# EAGLE board PCB (EAGLE 9.7.0)
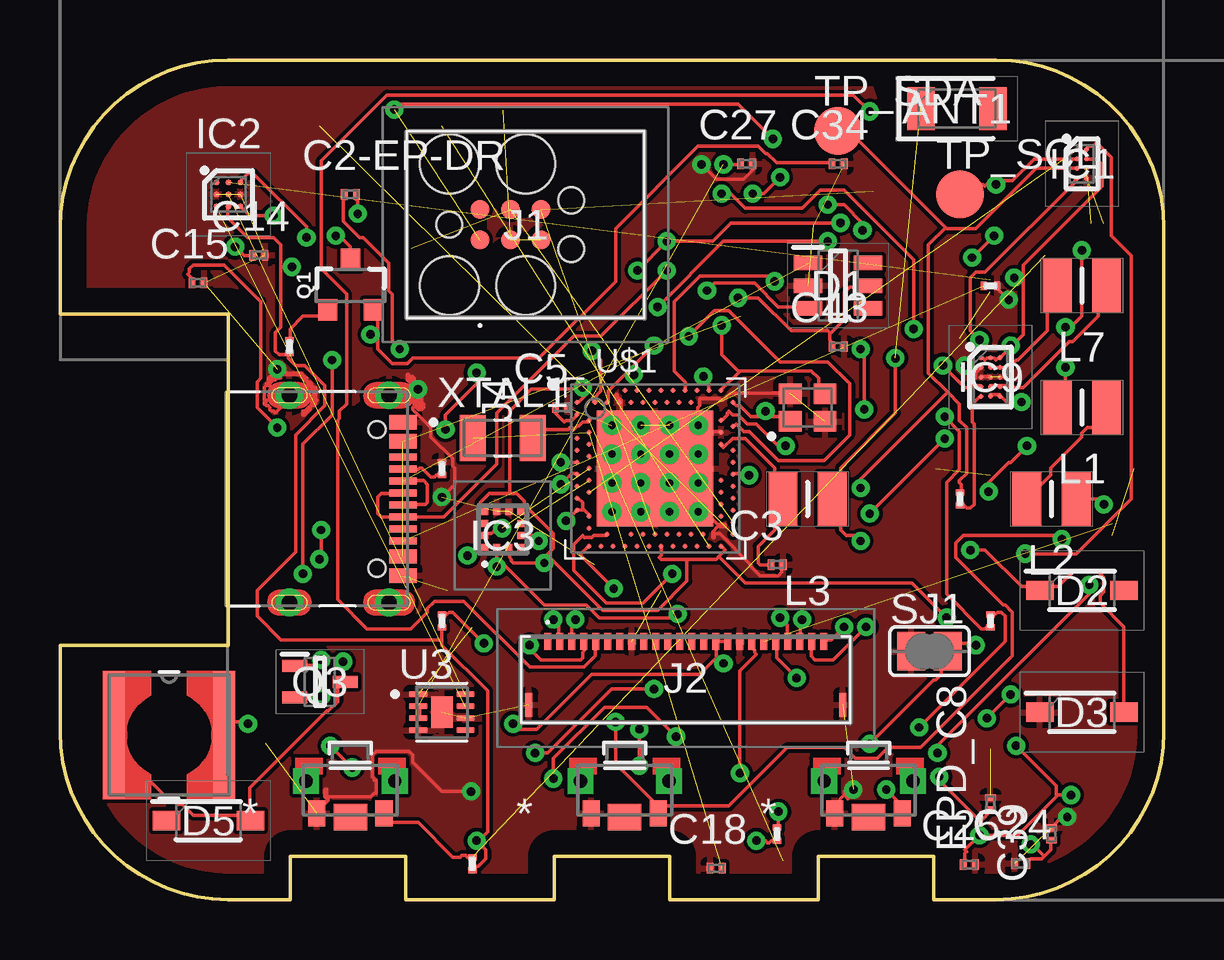
[diagram p0: board, top side]
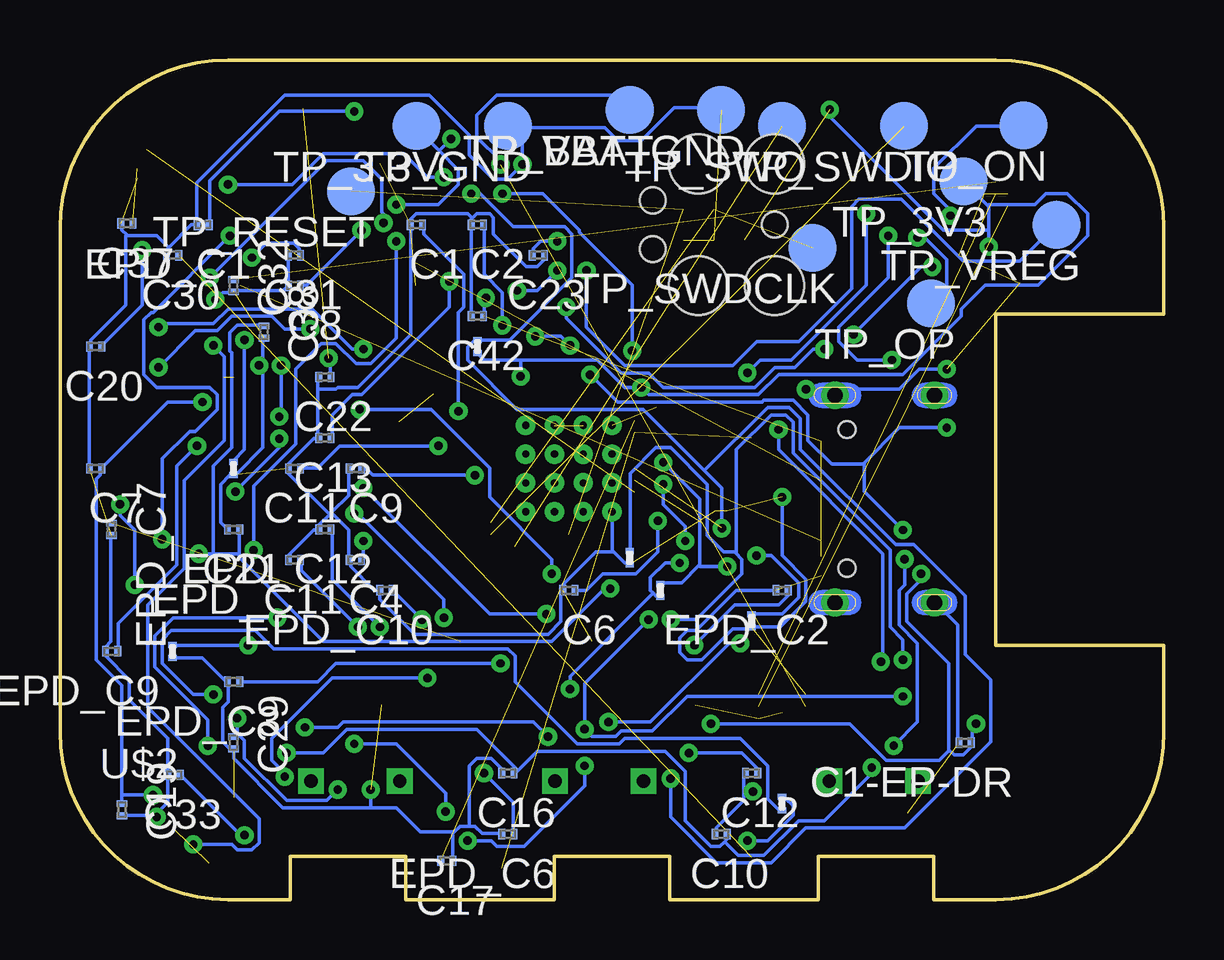
[diagram p1: board, bottom side, seen from below]

Size 46 x 35 mm. Coordinates in mm from the lower left corner, seen from the top.
Outline: 39,0 36.4,0 36.4,1.8 31.6,1.8 31.6,0 25.4,0 25.4,1.8 20.6,1.8 20.6,0 14.4,0 14.4,1.8 9.6,1.8 9.6,0 7,0 arc-90 0,7 0,10.6 7,10.6 7,24.4 0,24.4 0,28 arc-90 7,35 39,35 arc-90 46,28 46,7 arc-90 39,0
Copper layers (1*16): Top 0.035mm / dielectric 1.5mm / Bottom 0.035mm
Design rules "Fusion Electronics Design Rules": minimum track width 6mil, minimum drill 0.35mm, track to track 6mil, track to pad 6mil, pad to pad 6mil, via to via 6mil, smd to smd 6mil, copper to edge 40mil, drill to drill 6mil, minimum pad ring 10mil, minimum via ring 8mil, stop-mask expansion 4mil, vias tented up to drill 9999mil, thermal gap 10mil
tRestrict: area 33.8,30.7 to 41.1,34.4

## Footprints (pad centres in the part's own frame; a part is rotated, then mirrored left to right if it is on the bottom)
2450AT18B100E_ANTC3216X140N = smd 1.15 x 1.8: 1 -1.5,0; 2 1.5,0
NORDIC_NRF_3_RESC0201_L = smd 0.28 x 0.43: 1 -0.255,0; 2 0.255,0
ESP32_C6_LIBRARY_3_SOT95P280X145-6N = smd 1.2 x 0.6: 1 -1.25,0.95; 2 -1.25,0; 3 -1.25,-0.95; 4 1.25,-0.95; 5 1.25,0; 6 1.25,0.95
ESP32_C6_LIBRARY_5_SOD3716X135N = smd 1.15 x 0.8: 1 -1.75,0; 2 1.75,0
BQ25180YBGR_BGA8C40P2X4_100X155X50 = smd 0.2 x 0.2: A1 -0.2,0.6; A2 0.2,0.6; B1 -0.2,0.2; B2 0.2,0.2; C1 -0.2,-0.2; C2 0.2,-0.2; D1 -0.2,-0.6; D2 0.2,-0.6
DRV2605YZFR_BGA9C50P3X3_144X144X62 = smd 0.25 x 0.25: A1 -0.5,0.5; A2 0,0.5; A3 0.5,0.5; B1 -0.5,0; B2 0,0; B3 0.5,0; C1 -0.5,-0.5; C2 0,-0.5; C3 0.5,-0.5
BMA423_BMA423 = smd 0.3 x 0.35: 1 -0.75,-0.775; 2 -0.25,-0.775; 3 0.25,-0.775; 4 0.75,-0.775; 7 0.75,0.775; 8 0.25,0.775; 9 -0.25,0.775; 10 -0.75,0.775 | smd 0.35 x 0.3: 5 0.775,-0.25; 6 0.775,0.25; 11 -0.775,0.25; 12 -0.775,-0.25
RT6160AWSC_BGA15C40P3X5_140X230X60 = smd 0.216 x 0.216: A1 -0.4,0.8; A2 0,0.8; A3 0.4,0.8; B1 -0.4,0.4; B2 0,0.4; B3 0.4,0.4; C1 -0.4,0; C2 0,0; C3 0.4,0; D1 -0.4,-0.4; D2 0,-0.4; D3 0.4,-0.4; E1 -0.4,-0.8; E2 0,-0.8; E3 0.4,-0.8
TC2030-IDC_TC2030IDC = smd 0.783 x 0.783: 1 -0.953,-0.635; 2 -0.953,0.635; 3 0.317,-0.635; 4 0.317,0.635; 5 1.588,-0.635; 6 1.588,0.635 | hole 2.451: -2.223,-2.54; -2.223,2.54; 0.952,-2.54; 0.952,2.54 | hole 1.067: -2.223,0; 2.857,-1.016; 2.857,1.016
503480-2400_5034802400 = smd 0.3 x 0.7: 1 -5.75,1.525; 2 -5.25,1.525; 3 -4.75,1.525; 4 -4.25,1.525; 5 -3.75,1.525; 6 -3.25,1.525; 7 -2.75,1.525; 8 -2.25,1.525; 9 -1.75,1.525; 10 -1.25,1.525; 11 -0.75,1.525; 12 -0.25,1.525; 13 0.25,1.525; 14 0.75,1.525; 15 1.25,1.525; 16 1.75,1.525; 17 2.25,1.525; 18 2.75,1.525; 19 3.25,1.525; 20 3.75,1.525; 21 4.25,1.525; 22 4.75,1.525; 23 5.25,1.525; 24 5.75,1.525 | smd 0.3 x 1: MP1 -6.54,-1.125; MP2 6.54,-1.125
KH-TYPE-C-16P_KINGHELM_KH-TYPE-C-16P = smd 0.6 x 1.15: A1_B12 -3.2,4.725; A4_B9 -2.4,4.725; A9_B4 2.4,4.725; A12_B1 3.2,4.725 | smd 0.3 x 1.15: A5 -1.25,4.725; A6 -0.25,4.725; A7 0.25,4.725; A8 1.25,4.725; B5 1.75,4.725; B6 0.75,4.725; B7 -0.75,4.725; B8 -1.75,4.725 | drill 0.65 pad 1.05: SH1 -4.32,0; SH2 4.32,0; SH3 -4.32,4.15; SH4 4.32,4.15 | hole 0.7: -2.89,3.65; 2.89,3.65
MLP2016SR47MT0S1_INDC2016X100N = smd 1.2 x 2.2: 1 -1.028,0; 2 1.028,0
ESP32_C6_LIBRARY_2_IND_4828-WE-TPC_WRE = smd 0.9 x 5.3: 1 -2.286,0; 2 2.286,0
ESP32_C6_LIBRARY_4_ESP32_C6_LIBRARY_4_ESP32_C6_LIBRARY_4_ESP32_C6_LIBRARY_4_ESP32_WROVER_SPARKFUN-DISCRETESEMI_SOT23-3 = smd 0.8 x 0.9: 1 -0.95,-1; 2 0.95,-1; 3 0,1.1
ESP32_C6_LIBRARY_6_SOT65P210X110-3N = smd 1.05 x 0.5: 1 -1.05,0.65; 2 -1.05,-0.65; 3 1.05,0
CPF0201D7K68C1_0201 = smd 0.35 x 0.25: 1 0,0.275; 2 0,-0.275
ESP32_C6_LIBRARY_7_JUMPER_SJ = smd 1.168 x 1.6: 1 -0.762,0; 2 0.762,0
2025-10-22_07-23-44_LIBRARY_SW_EVP-AKE31A_PAN = smd 0.711 x 1.092: 1 -1.4,-0.972; 2 1.4,-0.972 | drill 0.559 pad 0.914 square: 3 -1.848,0.381; 4 1.848,0.381 | smd 1.397 x 1.092: 5 0,-1.124
HECTOR_WATCH_1_TP20R = smd 2 x 2: TP 0,0
ESP32_C6_LIBRARY_SON50P200X200X80-9N = smd 0.76 x 0.27: 1 -0.985,0.75; 2 -0.985,0.25; 3 -0.985,-0.25; 4 -0.985,-0.75; 5 0.985,-0.75; 6 0.985,-0.25; 7 0.985,0.25; 8 0.985,0.75 | smd 0.9 x 1.3: 9 0,0
NORDIC_NRF_4_AQFN50P700X700X85_HS-74N = smd 4.85 x 4.85: P$74 0,0 | drill 0.3 pad 0.6: P$75 -1.8,1.8; P$76 -0.6,1.8; P$77 0.6,1.8; P$78 1.8,1.8; P$79 -1.8,0.6; P$80 -0.6,0.6; P$81 0.6,0.6; P$82 1.8,0.6; P$83 -1.8,-0.6; P$84 -0.6,-0.6; P$85 0.6,-0.6; P$86 1.8,-0.6; P$87 -1.8,-1.8; P$88 -0.6,-1.8; P$89 0.6,-1.8; P$90 1.8,-1.8 | smd 0.2 x 0.2: P$A8 -1.25,3.25; P$A10 -0.75,3.25; P$A12 -0.25,3.25; P$A14 0.25,3.25; P$A16 0.75,3.25; P$A18 1.25,3.25; P$A20 1.75,3.25; P$A22 2.25,3.25; P$A23 2.75,3.25; P$AA24 3.25,-2.25; P$AB2 -2.75,-2.5; P$AC5 -2,-2.75; P$AC9 -1,-2.75; P$AC11 -0.5,-2.75; P$AC13 0,-2.75; P$AC15 0.5,-2.75; P$AC17 1,-2.75; P$AC19 1.5,-2.75; P$AC21 2,-2.75; P$AC24 3.25,-2.75; P$AD2 -2.75,-3.25; P$AD4 -2.25,-3.25; P$AD6 -1.75,-3.25; P$AD8 -1.25,-3.25; P$AD10 -0.75,-3.25; P$AD12 -0.25,-3.25; P$AD14 0.25,-3.25; P$AD16 0.75,-3.25; P$AD18 1.25,-3.25; P$AD20 1.75,-3.25; P$AD22 2.25,-3.25; P$AD23 2.75,-3.25; P$B1 -3.25,2.75; P$B3 -2.5,2.75; P$B5 -2,2.75; P$B7 -1.5,2.75; P$B9 -1,2.75; P$B11 -0.5,2.75; P$B13 0,2.75; P$B15 0.5,2.75; P$B17 1,2.75; P$B19 1.5,2.75; P$B24 3.25,2.75; P$C1 -3.25,2.25; P$D2 -2.75,2; P$D23 2.75,2; P$E24 3.25,1.75; P$F2 -2.75,1.5; P$F23 2.75,1.5; P$G1 -3.25,1.25; P$H2 -2.75,1; P$H23 2.75,1; P$J1 -3.25,0.75; P$J24 3.25,0.75; P$K2 -2.75,0.5; P$L1 -3.25,0.25; P$L24 3.25,0.25; P$M2 -2.75,0; P$N1 -3.25,-0.25; P$N24 3.25,-0.25; P$P2 -2.75,-0.5; P$P23 2.75,-0.5; P$R1 -3.25,-0.75; P$R24 3.25,-0.75; P$T2 -2.75,-1; P$T23 2.75,-1; P$U1 -3.25,-1.25; P$U24 3.25,-1.25; P$V23 2.75,-1.5; P$W1 -3.25,-1.75; P$W24 3.25,-1.75; P$Y2 -2.75,-2; P$Y23 2.75,-2
NORDIC_NRF_BT-XTAL_2016_N = smd 0.95 x 0.85: 1 -0.725,-0.575; 2 0.725,-0.575; 3 0.725,0.575; 4 -0.725,0.575
XTAL_ABS07-32.768KHZ-T = smd 1.1 x 1.9: 1 -1.25,0; 2 1.25,0

## Placement (x,y rotation side)
ANT1  2450AT18B100E_2450AT18B100E  [2450AT18B100E_ANTC3216X140N]  37.37,32.97 0 top
C1  12pF  [NORDIC_NRF_3_RESC0201_L]  31.15,28.13 180 bottom
C1-EP-DR  10uF  [NORDIC_NRF_3_RESC0201_L]  8.29,6.54 180 bottom
C2  12pF  [NORDIC_NRF_3_RESC0201_L]  28.61,28.13 180 bottom
C2-EP-DR  4.7uF/25V  [NORDIC_NRF_3_RESC0201_L]  12.1,29.4 0 top
C3  1pF  [NORDIC_NRF_3_RESC0201_L]  29.88,13.96 0 top
C4  1pF  [NORDIC_NRF_3_RESC0201_L]  33.69,14.16 180 bottom
C5  100nF  [NORDIC_NRF_3_RESC0201_L]  20.9,20.51 0 top
C6  4.7µF  [NORDIC_NRF_3_RESC0201_L]  24.8,12.89 180 bottom
C7  100nF  [NORDIC_NRF_3_RESC0201_L]  44.51,17.97 180 bottom
C8  100nF  [NORDIC_NRF_3_RESC0201_L]  36.23,25.59 180 bottom
C9  N.C.  [NORDIC_NRF_3_RESC0201_L]  33.69,17.97 180 bottom
C10  N.C.  [NORDIC_NRF_3_RESC0201_L]  18.45,2.73 180 bottom
C11  100pF  [NORDIC_NRF_3_RESC0201_L]  36.23,17.97 180 bottom
C12  100nF  [NORDIC_NRF_3_RESC0201_L]  17.18,5.27 180 bottom
C13  N.C.  [NORDIC_NRF_3_RESC0201_L]  34.96,19.24 180 bottom
C14  4.7µF  [NORDIC_NRF_3_RESC0201_L]  8.29,26.86 0 top
C15  1.0µF  [NORDIC_NRF_3_RESC0201_L]  5.75,25.71 0 top
C16  47nF  [NORDIC_NRF_3_RESC0201_L]  27.34,5.27 180 bottom
C17  12pF  [NORDIC_NRF_3_RESC0201_L]  29.88,1.61 180 bottom
C18  12pF  [NORDIC_NRF_3_RESC0201_L]  27.34,1.31 0 top
C19  100nF  [NORDIC_NRF_3_RESC0201_L]  43.42,3.75 270 bottom
C20  4.7µF  [NORDIC_NRF_3_RESC0201_L]  44.51,23.05 180 bottom
C21  4.7µF  [NORDIC_NRF_3_RESC0201_L]  38.77,15.43 180 bottom
C22  N.C.  [NORDIC_NRF_3_RESC0201_L]  34.96,21.78 180 bottom
C23  0.1uF  [NORDIC_NRF_3_RESC0201_L]  26.07,26.86 180 bottom
C24  10uF  [NORDIC_NRF_3_RESC0201_L]  40.03,1.5 0 top
C25  22uF  [NORDIC_NRF_3_RESC0201_L]  37.89,1.46 0 top
C27  0.1uF  [NORDIC_NRF_3_RESC0201_L]  28.61,30.67 0 top
C29  1uF  [NORDIC_NRF_3_RESC0201_L]  38.77,6.54 270 bottom
C30  1uF  [NORDIC_NRF_3_RESC0201_L]  41.31,26.86 180 bottom
C31  1uF  [NORDIC_NRF_3_RESC0201_L]  36.23,26.86 180 bottom
C32  1uF  [NORDIC_NRF_3_RESC0201_L]  38.77,25.59 270 bottom
C33  22uF  [NORDIC_NRF_3_RESC0201_L]  41.24,5.2 180 bottom
C34  0.1uF  [NORDIC_NRF_3_RESC0201_L]  32.42,30.67 0 top
C37  1uF  [NORDIC_NRF_3_RESC0201_L]  43.22,28.19 180 bottom
C38  1uF  [NORDIC_NRF_3_RESC0201_L]  37.5,23.66 270 bottom
C39  10uF  [NORDIC_NRF_3_RESC0201_L]  41.31,2.73 90 top
C42  0.1uF  [NORDIC_NRF_3_RESC0201_L]  28.61,24.32 180 bottom
C43  4.7uF  [NORDIC_NRF_3_RESC0201_L]  32.42,23.05 0 top
D1  ESP32_C6_LIBRARY_3_USBLC6-2SC6Y  [ESP32_C6_LIBRARY_3_SOT95P280X145-6N]  32.42,25.59 0 top
D2  ESP32_C6_LIBRARY_5_MBR0530  [ESP32_C6_LIBRARY_5_SOD3716X135N]  42.58,12.89 0 top
D3  ESP32_C6_LIBRARY_5_MBR0530  [ESP32_C6_LIBRARY_5_SOD3716X135N]  42.58,7.81 0 top
D5  ESP32_C6_LIBRARY_5_MBR0530  [ESP32_C6_LIBRARY_5_SOD3716X135N]  6.18,3.29 0 top
EPD_C1  1uF/50V  [NORDIC_NRF_3_RESC0201_L]  40.04,28.13 180 bottom
EPD_C2  1uF/50V  [NORDIC_NRF_3_RESC0201_L]  15.91,12.89 180 bottom
EPD_C3  0.1uF/50V  [NORDIC_NRF_3_RESC0201_L]  38.77,9.08 180 bottom
EPD_C6  1uF/50V  [NORDIC_NRF_3_RESC0201_L]  27.34,2.73 180 bottom
EPD_C7  1uF/50V  [NORDIC_NRF_3_RESC0201_L]  43.85,15.43 270 bottom
EPD_C8  1uF/50V  [NORDIC_NRF_3_RESC0201_L]  38.77,4 90 top
EPD_C9  1uF/50V  [NORDIC_NRF_3_RESC0201_L]  43.85,10.35 180 bottom
EPD_C10  1uF/50V  [NORDIC_NRF_3_RESC0201_L]  32.42,12.89 180 bottom
EPD_C11  1uF/50V  [NORDIC_NRF_3_RESC0201_L]  36.23,14.16 180 bottom
EPD_C12  1uF/50V  [NORDIC_NRF_3_RESC0201_L]  34.96,15.43 180 bottom
IC1  BQ25180YBGR_BQ25180YBGR  [BQ25180YBGR_BGA8C40P2X4_100X155X50]  42.58,30.67 0 top
IC2  DRV2605YZFR_DRV2605YZFR  [DRV2605YZFR_BGA9C50P3X3_144X144X62]  7.02,29.4 0 top
IC3  BMA423_BMA423  [BMA423_BMA423]  18.45,15.43 0 top
IC9  RT6160AWSC_RT6160AWSC  [RT6160AWSC_BGA15C40P3X5_140X230X60]  38.77,21.78 0 top
J1  TC2030-IDC_TC2030-IDC  [TC2030-IDC_TC2030IDC]  18.45,28.13 0 top
J2  503480-2400_503480-2400  [503480-2400_5034802400]  26.07,9.24 0 top
J4  KH-TYPE-C-16P_KH-TYPE-C-16P  [KH-TYPE-C-16P_KINGHELM_KH-TYPE-C-16P]  9.56,16.7 270 top
L1  10µH  [MLP2016SR47MT0S1_INDC2016X100N]  42.58,20.51 0 top
L2  15nH  [MLP2016SR47MT0S1_INDC2016X100N]  41.31,16.7 0 top
L3  3.9nH  [MLP2016SR47MT0S1_INDC2016X100N]  31.15,16.7 0 top
L5  68uH  [ESP32_C6_LIBRARY_2_IND_4828-WE-TPC_WRE]  4.54,6.86 0 top
L7  MLP2016SR47MT0S1_FTC252012SR47MBCA  [MLP2016SR47MT0S1_INDC2016X100N]  42.58,25.59 0 top
Q1  20V/4.2A/52mΩ/1.4W  [ESP32_C6_LIBRARY_4_ESP32_C6_LIBRARY_4_ESP32_C6_LIBRARY_4_ESP32_C6_LIBRARY_4_ESP32_WROVER_SPARKFUN-DISCRETESEMI_SOT23-3]  12.1,25.59 0 top
Q3  ESP32_C6_LIBRARY_6_SI1308EDL-T1-GE3  [ESP32_C6_LIBRARY_6_SOT65P210X110-3N]  10.83,9.08 0 top
R1_EP_DR  0.47  [CPF0201D7K68C1_0201]  29.88,2.73 0 top
R1_USB  5K1  [CPF0201D7K68C1_0201]  15.91,17.97 0 top
R2  0  [CPF0201D7K68C1_0201]  37.5,16.7 0 top
R2_EP_DR  10K  [CPF0201D7K68C1_0201]  22.26,14.25 180 bottom
R2_USB  5K1  [CPF0201D7K68C1_0201]  38.77,25.59 90 top
R3  0  [CPF0201D7K68C1_0201]  17.18,11.62 180 bottom
R4  0  [CPF0201D7K68C1_0201]  38.77,11.62 0 top
R5  10K  [CPF0201D7K68C1_0201]  17.18,1.49 0 top
R7  10K  [CPF0201D7K68C1_0201]  15.91,4 180 bottom
R8  10K  [CPF0201D7K68C1_0201]  15.91,11.62 0 top
R9  10K  [CPF0201D7K68C1_0201]  38.77,17.97 180 bottom
R17  3K3  [CPF0201D7K68C1_0201]  28.61,23.05 180 bottom
R18  3K3  [CPF0201D7K68C1_0201]  20.99,12.89 180 bottom
R_PWR_EPD  10K  [CPF0201D7K68C1_0201]  9.56,23.05 0 top
R_TYPE_SEL  2.2  [CPF0201D7K68C1_0201]  41.31,10.35 180 bottom
SJ1  [ESP32_C6_LIBRARY_7_JUMPER_SJ]  36.23,10.35 0 top
SW_DN  2025-10-22_07-23-44_LIBRARY_EVP-AKE31ASW_EVP-AKE31A_PAN  [2025-10-22_07-23-44_LIBRARY_SW_EVP-AKE31A_PAN]  33.69,4.56 0 top
SW_ENT  2025-10-22_07-23-44_LIBRARY_EVP-AKE31ASW_EVP-AKE31A_PAN  [2025-10-22_07-23-44_LIBRARY_SW_EVP-AKE31A_PAN]  23.53,4.56 0 top
SW_UP  2025-10-22_07-23-44_LIBRARY_EVP-AKE31ASW_EVP-AKE31A_PAN  [2025-10-22_07-23-44_LIBRARY_SW_EVP-AKE31A_PAN]  12.1,4.56 0 top
TP_3.3V  HECTOR_WATCH_1_TPTP20R  [HECTOR_WATCH_1_TP20R]  31.15,32.24 180 bottom
TP_3V3  HECTOR_WATCH_1_TPTP20R  [HECTOR_WATCH_1_TP20R]  8.36,29.95 180 bottom
TP_BAT_GND  HECTOR_WATCH_1_TPTP20R  [HECTOR_WATCH_1_TP20R]  18.45,32.91 180 bottom
TP_GND  HECTOR_WATCH_1_TPTP20R  [HECTOR_WATCH_1_TP20R]  27.34,32.24 180 bottom
TP_ON  HECTOR_WATCH_1_TPTP20R  [HECTOR_WATCH_1_TP20R]  5.86,32.27 180 bottom
TP_OP  HECTOR_WATCH_1_TPTP20R  [HECTOR_WATCH_1_TP20R]  9.7,24.85 180 bottom
TP_RESET  HECTOR_WATCH_1_TPTP20R  [HECTOR_WATCH_1_TP20R]  33.88,29.53 180 bottom
TP_SCL  HECTOR_WATCH_1_TPTP20R  [HECTOR_WATCH_1_TP20R]  37.5,29.4 0 top
TP_SDA  HECTOR_WATCH_1_TPTP20R  [HECTOR_WATCH_1_TP20R]  32.42,32.04 0 top
TP_SWDCLK  HECTOR_WATCH_1_TPTP20R  [HECTOR_WATCH_1_TP20R]  14.64,27.16 180 bottom
TP_SWDIO  HECTOR_WATCH_1_TPTP20R  [HECTOR_WATCH_1_TP20R]  10.83,32.24 180 bottom
TP_SWO  HECTOR_WATCH_1_TPTP20R  [HECTOR_WATCH_1_TP20R]  15.91,32.24 180 bottom
TP_VBAT  HECTOR_WATCH_1_TPTP20R  [HECTOR_WATCH_1_TP20R]  22.26,32.91 180 bottom
TP_VREG  HECTOR_WATCH_1_TPTP20R  [HECTOR_WATCH_1_TP20R]  4.48,28.13 180 bottom
U3  ESP32_C6_LIBRARY_MAX17048G+T10  [ESP32_C6_LIBRARY_SON50P200X200X80-9N]  15.91,7.81 0 top
U$1  NORDIC_NRF_4_NRF52840_QF  [NORDIC_NRF_4_AQFN50P700X700X85_HS-74N]  24.8,17.97 0 top
U$2  32MHz  [NORDIC_NRF_BT-XTAL_2016_N]  31.15,20.51 0 top
XTAL1  32.768kHz  [XTAL_ABS07-32.768KHZ-T]  18.45,19.24 0 top

## Library data of the parts
ANT1 = InkTime_v5; ARROW_PART_NUMBER: 2450AT18B100E; ARROW_PRICE-STOCK: https://www.arrow.com/en/products/2450at18b100e/johanson-dielectrics?utm_currency=USD&region=nac; DESCRIPTION: Antennas 2.45GHz ANTENNA; HEIGHT: 1.4mm; MANUFACTURER_NAME: JOHANSON TECHNOLOGY; MANUFACTURER_PART_NUMBER: 2450AT18B100E; MOUSER_PART_NUMBER: 609-2450AT18B100E; MOUSER_PRICE-STOCK: https://www.mouser.co.uk/ProductDetail/Johanson-Technology/2450AT18B100E?qs=yCnrNFeXz%252Bh5MFsFIXGZGA%3D%3D
C1 C1-EP-DR C2 C2-EP-DR C3-C25 C27 C29-C34 C37-C39 C42 C43 EPD_C1-EPD_C3 EPD_C6-EPD_C12 R1_EP_DR R1_USB R2 R2_EP_DR R2_USB R3-R5 R7-R9 R17 R18 R_PWR_EPD R_TYPE_SEL SJ1 TP_3.3V TP_3V3 TP_BAT_GND TP_GND TP_ON TP_OP TP_RESET TP_SCL TP_SDA TP_SWDCLK TP_SWDIO TP_SWO TP_VBAT TP_VREG U$1 U$2 = InkTime_v5
D1 = InkTime_v5; AVAILABILITY: In Stock; CHECK_PRICES: https://www.snapeda.com/parts/USBLC6-2SC6Y/STMicroelectronics/view-part/?ref=eda; DESCRIPTION: 17V Clamp 5A (8/20µs) Ipp Tvs Diode Surface Mount SOT-23-6; MF: STMicroelectronics; MP: USBLC6-2SC6Y; PACKAGE: SOT-23-6 STMicroelectronics; PRICE: None; SNAPEDA_LINK: https://www.snapeda.com/parts/USBLC6-2SC6Y/STMicroelectronics/view-part/?ref=snap
D2 D3 D5 = InkTime_v5; AVAILABILITY: In Stock; CHECK_PRICES: https://www.snapeda.com/parts/MBR0530/Onsemi/view-part/?ref=eda; DESCRIPTION: Diode Schottky 30 V 500mA Surface Mount SOD-123; MF: ON Semiconductor; MP: MBR0530; PACKAGE: SOD-123-2 ON Semiconductor; PRICE: None; PURCHASE-URL: https://www.snapeda.com/api/url_track_click_mouser/?unipart_id=179458&manufacturer=ON Semiconductor&part_name=MBR0530&search_term=None; SNAPEDA_LINK: https://www.snapeda.com/parts/MBR0530/Onsemi/view-part/?ref=snap
IC1 = InkTime_v5; ARROW_PART_NUMBER: BQ25180YBGR; ARROW_PRICE-STOCK: https://www.arrow.com/en/products/bq25180ybgr/texas-instruments?utm_currency=USD&region=nac; DESCRIPTION: Charger IC Lithium Ion/Polymer, Lithium Iron Phosphate 8-DSBGA (1.6x1.1); HEIGHT: 0.5mm; MANUFACTURER_NAME: Texas Instruments; MANUFACTURER_PART_NUMBER: BQ25180YBGR; MOUSER_PART_NUMBER: 595-BQ25180YBGR; MOUSER_PRICE-STOCK: https://www.mouser.co.uk/ProductDetail/Texas-Instruments/BQ25180YBGR?qs=doiCPypUmgEWjAK%252BJAX6Tw%3D%3D
IC2 = InkTime_v5; ARROW_PART_NUMBER: DRV2605YZFR; ARROW_PRICE-STOCK: https://www.arrow.com/en/products/drv2605yzfr/texas-instruments?region=nac; DESCRIPTION: Haptic Driver for ERM/LRA with Built-In Library and Smart Loop Architecture; HEIGHT: 0.625mm; MANUFACTURER_NAME: Texas Instruments; MANUFACTURER_PART_NUMBER: DRV2605YZFR
IC3 = InkTime_v5; ARROW_PART_NUMBER: BMA423; ARROW_PRICE-STOCK: https://www.arrow.com/en/products/bma423/bosch; DESCRIPTION: Accelerometers Triaxial low-g 12bit Acceleration Sensor; HEIGHT: 1mm; MANUFACTURER_NAME: BOSCH; MANUFACTURER_PART_NUMBER: BMA423; MOUSER_PART_NUMBER: 262-BMA423; MOUSER_PRICE-STOCK: https://www.mouser.co.uk/ProductDetail/Bosch-Sensortec/BMA423?qs=HXFqYaX1Q2xC%252BSgeGoX3mg%3D%3D
IC9 = InkTime_v5; DESCRIPTION: Buck-Boost Regulator Positive Output Step-Up/Step-Down I2C DC-DC Controller IC 15-WL-CSP (BSC) (1.4x2.3); HEIGHT: 0.6mm; MANUFACTURER_NAME: RICHTEK; MANUFACTURER_PART_NUMBER: RT6160AWSC; MOUSER_PART_NUMBER: 835-RT6160AWSC; MOUSER_PRICE-STOCK: https://www.mouser.co.uk/ProductDetail/Richtek/RT6160AWSC?qs=amGC7iS6iy%2FLd9PSoixZXQ%3D%3D
J1 = InkTime_v5; DESCRIPTION: CABLE ADAPTER 6 POS; HEIGHT: 19mm; MANUFACTURER_NAME: Tag Connect; MANUFACTURER_PART_NUMBER: TC2030-IDC
J2 = InkTime_v5; DESCRIPTION: FFC & FPC Connectors 0.5mm FPC RA SMT Dual Contact 24Ckt; HEIGHT: 1.87mm; MANUFACTURER_NAME: Molex; MANUFACTURER_PART_NUMBER: 503480-2400; MOUSER_PART_NUMBER: 538-503480-2400; MOUSER_PRICE-STOCK: https://www.mouser.co.uk/ProductDetail/Molex/503480-2400?qs=OAhjpuo3Vu7efIoxFh9AOw%3D%3D
J4 = InkTime_v5; AVAILABILITY: Not in stock; CHECK_PRICES: https://www.snapeda.com/parts/KH-TYPE-C-16P/Kinghelm/view-part/?ref=eda; MF: kinghelm; MP: KH-TYPE-C-16P; PACKAGE: None; PRICE: None; SNAPEDA_LINK: https://www.snapeda.com/parts/KH-TYPE-C-16P/Kinghelm/view-part/?ref=snap
L1-L3 L7 = InkTime_v5; DESCRIPTION: SMD / SMT Inductors (Coils), L=0.47?H, L x W x T :; HEIGHT: 1mm; JLCPCB: https://jlcpcb.com/partdetail/6763488-FTC252012SR47MBCA/C5832368; MANUFACTURER_NAME: TDK; MANUFACTURER_PART_NUMBER: FTC252012SR47MBCA
L5 = InkTime_v5; COPYRIGHT: Copyright (C) 2024 Ultra Librarian. All rights reserved.; MANUFACTURER_PART_NUMBER: 744043680; MFR_NAME: Wurth Electronics
Q1 = InkTime_v5; PROD_ID: TRAN-14388
Q3 = InkTime_v5; AVAILABILITY: In Stock; CHECK_PRICES: https://www.snapeda.com/parts/SI1308EDL-T1-GE3/Vishay+Siliconix/view-part/?ref=eda; DESCRIPTION: Si1308EDL-T1-GE3 N-channel MOSFET Transistor, 1.5 A, 30 V, 3-Pin SC-70 | Siliconix / Vishay SI1308EDL-T1-GE3; MF: Vishay Siliconix; MP: SI1308EDL-T1-GE3; PACKAGE: SOT-323 Vishay Semiconductor; PRICE: None; PURCHASE-URL: https://www.snapeda.com/api/url_track_click_mouser/?unipart_id=274603&manufacturer=Vishay Siliconix&part_name=SI1308EDL-T1-GE3&search_term=None; SNAPEDA_LINK: https://www.snapeda.com/parts/SI1308EDL-T1-GE3/Vishay+Siliconix/view-part/?ref=snap
SW_DN SW_ENT SW_UP = InkTime_v5; COPYRIGHT: Copyright (C) 2025 Ultra Librarian. All rights reserved.; DIGI-KEY_PART_NUMBER_1: P123437TR-ND; DIGI-KEY_PART_NUMBER_2: P123437CT-ND; DIGI-KEY_PART_NUMBER_3: P123437DKR-ND; MANUFACTURER_NAME: Panasonic; MANUFACTURER_PART_NUMBER: EVP-AKE31A
U3 = InkTime_v5; AVAILABILITY: In Stock; CHECK_PRICES: https://www.snapeda.com/parts/MAX17048G+T10/Analog+Devices/view-part/?ref=eda; DESCRIPTION: 3µA 1-Cell/2-Cell Fuel Gauge with ModelGauge; MF: Analog Devices; MP: MAX17048G+T10; PACKAGE: TDFN-8 Maxim; PRICE: None; PURCHASE-URL: https://www.snapeda.com/api/url_track_click_mouser/?unipart_id=329239&manufacturer=Analog Devices&part_name=MAX17048G+T10&search_term=None; SNAPEDA_LINK: https://www.snapeda.com/parts/MAX17048G+T10/Analog+Devices/view-part/?ref=snap
XTAL1 = Frequency-Source; CATEGORY: Crystal; DATASHEET: https://abracon.com/Resonators/ABS07.pdf; DESCRIPTION: 32.768 kHz ±20 ppm Crystal 12.5 pF 70 kOhms 2-SMD No Lead; FREQUENCY: 32.768 kHz; FREQUENCY_STABILITY: NA; LOAD_CAPACITANCE: 12.5 pF; MANUFACTURER: Abracon LLC; MPN: ABS07-32.768KHZ-T; OPERATING_TEMPERATURE: -40°C ~ 85°C; PACKAGE_SIZE: 2-SMD No Lead; PACKAGE_TYPE: Surface Mount; PART_STATUS: Active; ROHS: Compliant; SERIES: ABS07; SUBCATEGORY: Oscillators; TOLERANCE: ±20 ppm; TYPE: Resonators

## Nets
3V3/1.7D: C34.1 IC2.C2 Q1.2 R5.2 R7.2 R8.2 R_PWR_EPD.2
3V3/2.4A: C7.1 C8.1 C12.1 C14.1 C19.1 C25.1 C33.1 IC3.3 IC3.7 IC3.10 IC9.E2 IC9.E3 J1.1 R17.1 R18.1 TP_3.3V.TP TP_3V3.TP U$1.P$A22 U$1.P$AD14 U$1.P$AD23 U$1.P$B1
ALERT/1.6C: U3.5
ALERT/2.5C: U$1.P$J24
D+/1.5D: D1.4
D+/2.7D: U$1.P$AD6
D-/1.5D: D1.6
D-/2.7D: U$1.P$AD4
DN: D1.1 J4.A7 J4.B7
DP: D1.3 J4.A6 J4.B6
EPD_3V3: C1-EP-DR.1 EPD_C3.1 J2.15 J2.16 L5.2 Q1.3
EPD_BUSY/1.5D: J2.9
EPD_BUSY/2.2D: U$1.P$AD12
EPD_CS/1.4C: J2.12
EPD_CS/2.2D: U$1.P$K2
EPD_DC/1.5D: J2.11
EPD_DC/2.2D: U$1.P$AD10
EPD_RST/1.5D: J2.10
EPD_RST/2.2D: U$1.P$AC11
GDR: J2.2 Q3.1 R2_EP_DR.2
GND: C1-EP-DR.2 C1.2 C2.2 C3.2 C4.2 C5.2 C6.2 C7.2 C8.2 C9.2 C10.2 C11.2 C12.2 C13.2 C14.2 C15.2 C16.2 C17.1 C18.1 C19.2 C20.2 C21.2 C22.2 C23.1 C24.1 C25.2 C27.2 C29.2 C30.2 C31.2 C32.2 C33.2 C34.2 C37.2 C38.2 C39.2 C42.2 C43.2 D1.2 D3.1 EPD_C1.2 EPD_C2.2 EPD_C3.2 EPD_C6.2 EPD_C7.2 EPD_C8.2 EPD_C9.2 EPD_C10.2 EPD_C11.2 EPD_C12.2 IC1.D2 IC2.B1 IC2.B3 IC3.8 IC3.9 IC9.B1 IC9.C1 IC9.C2 IC9.C3 J1.3 J1.5 J2.8 J2.17 J2.MP1 J2.MP2 J4.A1_B12 J4.A12_B1 J4.SH1 J4.SH2 J4.SH3 J4.SH4 R1_USB.1 R2_EP_DR.1 R2_USB.2 R3.1 R9.1 R_TYPE_SEL.1 SJ1.1 SW_DN.1 SW_ENT.1 SW_UP.1 TP_BAT_GND.TP TP_GND.TP U3.1 U3.4 U3.6 U3.9 U$1.P$74 U$1.P$75 U$1.P$76 U$1.P$77 U$1.P$78 U$1.P$79 U$1.P$80 U$1.P$81 U$1.P$82 U$1.P$83 U$1.P$84 U$1.P$85 U$1.P$86 U$1.P$87 U$1.P$88 U$1.P$89 U$1.P$90 U$1.P$B7 U$1.P$F23 U$2.2 U$2.4
HAPTIC_EN/1.4C: IC2.A1
HAPTIC_EN/2.6A: C6.1 U$1.P$U1 U$1.P$W1 U$1.P$Y2
IMU_INT1: IC3.5 U$1.P$N1
IMU_INT2: IC3.6 U$1.P$P2
LX1 [LX1]: IC9.B2 IC9.B3 L7.1
LX2: IC9.D2 IC9.D3 L7.2
MOSI/1.5B: J2.14
MOSI/2.2D: U$1.P$B13
N$1: EPD_C2.1 J2.4
N$2: L1.1 U$1.P$B3
N$3: IC1.D1 R9.2
N$4: C10.1 C15.1 C16.1 L2.2 U$1.P$B5 U$1.P$E24
N$5: IC9.E1 R2.2
N$6: EPD_C1.1 J2.5
N$7: IC9.D1 R4.2
N$8: J4.A5 R1_USB.2
N$9: R1_EP_DR.1 R_TYPE_SEL.2 SJ1.2
N$10: EPD_C6.1 J2.18
N$11: IC3.1 R3.2
N$12: EPD_C7.1 J2.19
N$13: EPD_C8.1 J2.20
N$14: C2-EP-DR.2 D5.2 L5.1 Q3.3
N$15: C2-EP-DR.1 D2.1 D3.2
N$16: EPD_C9.1 J2.21
N$17: EPD_C10.1 J2.22
N$18: EPD_C11.1 J2.23
N$19: C13.1 U$1.P$A18
N$20: EPD_C12.1 J2.24
N$21: J4.B5 R2_USB.1
N$23: L1.2 L2.1
N$25: C32.1 IC2.A2
N$52: C11.1 U$1.P$D23
N$54: C9.1 U$1.P$N24
N$55: C20.1 U$1.P$AC5
N$69: C5.1 U$1.P$C1
N$70: C2.1 U$1.P$A23 U$2.3
N$71: C1.1 U$1.P$B24 U$2.1
N$72: C3.1 L3.1 U$1.P$H23
N$73: C17.2 U$1.P$D2 XTAL1.2
N$74: ANT1.1 C4.1 C22.1 L3.2
N$75: C18.2 U$1.P$F2 XTAL1.1
N$76: J1.2
OUT+: IC2.A3 TP_OP.TP
OUT-: IC2.C3 TP_ON.TP
P0.04: U$1.P$J1
P0.09: U$1.P$L24
P0.13/1.5D: C30.1 R5.1 SW_UP.2
P0.13/2.6C: U$1.P$AD8
P0.14/1.5D: C31.1 R8.1 SW_ENT.2
P0.14/2.7C: U$1.P$AC9
P0.19: U$1.P$AC15
P0.20: U$1.P$AD16
P0.21: U$1.P$AC17
P0.22: U$1.P$AD18
P0.23: U$1.P$AC19
P0.24: U$1.P$AD20
P0.25: U$1.P$AC21
P0.26: U$1.P$G1
P0.27: U$1.P$H2
P0.28: U$1.P$B11
P0.29: U$1.P$A10
P0.30: U$1.P$B9
P0.31: U$1.P$A8
P1.01/1.6C: Q1.1 R_PWR_EPD.1
P1.01/2.4B: U$1.P$Y23
P1.02/1.6C: C29.1 R7.1 SW_DN.2
P1.02/2.8C: U$1.P$W24
P1.03: U$1.P$V23
P1.04: U$1.P$U24
P1.05: U$1.P$T23
P1.06: U$1.P$R24
P1.07: U$1.P$P23
P1.09: U$1.P$R1
P1.10: U$1.P$A20
P1.11: U$1.P$B19
P1.12: U$1.P$B17
P1.13: U$1.P$A16
P1.14: U$1.P$B15
P1.15: U$1.P$A14
PMIC_INT: IC1.A1 U$1.P$T2
PREVGH: D5.1
PREVGL: D2.2
RESE: J2.3 Q3.2 R1_EP_DR.2
RESET: J1.6 TP_RESET.TP U$1.P$AC13
SCK/1.5B: J2.13
SCK/2.2D: U$1.P$A12
SCL/1.4C: IC2.C1 U3.7
SCL/2.4C: IC1.B1 IC3.12 R4.1 R17.2 TP_SCL.TP U$1.P$M2
SDA/1.4C: IC2.B2 U3.8
SDA/2.4C: IC1.C1 IC3.2 R2.1 R18.2 TP_SDA.TP U$1.P$L1
SWDCLK: J1.4 TP_SWDCLK.TP U$1.P$AA24
SWDIO: TP_SWDIO.TP U$1.P$AC24
SWO: TP_SWO.TP U$1.P$AD22
VBAT/1.2A: C27.1 TP_VBAT.TP U3.2 U3.3
VBAT/2.5C: C37.1 IC1.C2
VBUS/1.5D: C42.1 C43.1 D1.5 J4.A4_B9 J4.A9_B4
VBUS/2.6D: C21.1 C38.1 IC1.A2 U$1.P$AD2
VREG: C23.2 C24.2 C39.1 IC1.B2 IC9.A1 IC9.A2 IC9.A3 TP_VREG.TP

## Tracks (layer width: path | path; a pad name or v marks a point on that pad's centre or on a via)
3V3/1.7D  (via drill 0.35)
  Top 0.152: R5.2 17.2,1.23 17.36,1.38 17.43,1.38 17.74,1.69 17.74,2.07 v17.36,2.45 17.43,2.45 17.81,2.83 17.81,8.7 15.91,10.6 15.91,10.83 | 15.91,10.83 R8.2 | 9.2,26.38 9.2,23.86 8.98,23.63 8.98,22.87 9.13,22.72 9.36,22.72 9.51,22.87 9.58,22.8 R_PWR_EPD.2 9.51,22.72 9.51,22.57 9.81,22.26 10.19,22.26 11.03,21.42 11.03,20.59 9.81,19.37 9.81,14.49 8.21,12.89 8.21,11.82 9.2,10.83 15.91,10.83 | 9.2,26.38 9.2,27.29 8.9,27.6 7.83,27.6 6.99,28.44 6.99,28.89 IC2.C2 | 13.24,23.56 13.24,24.4 13.09,24.55 Q1.2 | 13.24,23.56 13.24,22.95 13.85,22.34 14.46,22.34 14.69,22.57 19.95,22.57 23.15,25.77 23.15,27.98 26.58,31.41 29.09,31.41 29.4,31.1 29.47,31.1 29.85,30.72 32.14,30.72 C34.1 | v9.66,26.38 9.2,26.38 | 13.24,23.56 v12.94,23.56
  Bottom 0.152: v17.36,2.45 16.52,2.45 15.45,3.52 15.45,3.9 15.76,4.2 15.91,4.2 R7.2 | v9.66,26.38 10.12,26.38 v12.94,23.56
3V3/2.4A  (via drill 0.35)  (1 unrouted)
  Top 0.152: C25.1 37.7,1.46 37.7,1.92 37.78,1.99 37.7,2.07 v38.31,2.68 39.91,2.68 41.55,4.32 | IC9.E2 38.77,21.04 39.15,21.04 IC9.E3 39.23,20.97 39.53,20.66 39.99,20.66 v40.06,20.74 | 41.55,4.32 41.59,4.36 v42.12,4.36 | 26.12,14.19 27.34,14.19 27.45,14.3 | 26.12,14.19 25.05,14.19 24.98,14.26 25.05,14.34 U$1.P$AD14 | 27.45,14.3 27.72,14.57 27.57,14.72 U$1.P$AD23 | 18.73,16.93 19.03,16.93 19.34,16.62 19.34,16.4 19.19,16.24 IC3.7 19.26,16.24 19.57,16.24 20.56,15.25 20.56,14.64 20.06,14.15 | 18.73,16.93 17.89,16.93 17.51,16.55 17.51,16.47 17.66,16.32 17.66,16.24 IC3.10 | 20.06,14.15 19.95,14.03 18.88,14.03 18.81,14.11 18.81,14.19 18.73,14.26 18.73,14.64 IC3.3 | 20.06,14.15 v20.18,14.03 20.33,14.34 22.62,12.05 24.9,12.05 26.12,13.27 26.12,14.19 | v19.8,6.11 20.33,6.11 23,8.78 v24.75,8.78 | v33.44,27.9 33.44,28.21 32.67,28.97 v31.99,28.97 | v7.3,27.22 7.68,26.84 7.98,26.84 C14.1 | U$1.P$B1 21.62,20.74 21.93,21.04 21.93,21.2 v21.78,21.35 21.78,21.27 19.64,21.27 18.73,20.36 18.73,16.93 | v26.81,21.81 27.03,21.58 27.03,21.27 U$1.P$A22 | v29.7,31.71 28.25,33.16 14.16,33.16 v13.93,32.93 | v39.84,6.41 41.51,4.74 41.51,4.36 41.55,4.32 | v36.94,11.75 35.49,13.2 28.56,13.2 27.45,14.3
  Bottom 0.152: v38.31,2.68 38.46,2.68 C33.1 | v40.06,20.74 41.51,20.74 44.26,18 C7.1 44.33,17.92 44.33,17.69 44.48,17.54 44.48,9.99 43.42,8.93 43.42,4.36 | 43.42,4.36 43.42,4.05 C19.1 | 43.42,4.36 v42.12,4.36 | 21.28,12.78 21.4,12.89 21.4,13.42 20.79,14.03 v20.18,14.03 | 21.28,12.78 21.17,12.66 21.01,12.66 R18.1 | v19.8,6.11 17.59,6.11 16.98,5.5 16.98,5.27 C12.1 | v24.75,8.78 24.75,9.31 21.28,12.78 | v33.44,27.9 35.72,25.62 35.95,25.62 C8.1 | v31.99,28.97 30.24,28.97 29.4,29.81 29.4,30.42 30.2,31.22 | 30.2,31.22 31.15,32.17 TP_3.3V.TP | 7.3,27.9 7.3,28.89 7.34,28.93 | 7.3,27.9 v7.3,27.22 | 7.34,28.93 8.29,29.88 TP_3V3.TP | 26.81,22.49 28.33,22.49 28.56,22.72 R17.1 | 26.81,22.49 23.61,22.49 22.46,21.35 v21.78,21.35 21.47,21.04 16.9,21.04 16.06,21.88 10.88,21.88 8.44,24.32 8.44,24.62 7.45,25.62 5.24,25.62 3.19,27.67 3.19,28.59 4.02,29.43 4.94,29.43 5.39,28.97 7.3,28.97 7.34,28.93 | 26.81,22.49 v26.81,21.81 | v29.7,31.71 30.2,31.22 | v13.93,32.93 13.93,32.63 9.2,27.9 7.3,27.9 | v39.84,6.41 39.84,7.48 42.05,9.69 42.05,10.99 41.28,11.75 v36.94,11.75
DN  (1 unrouted)
  Top 0.152: J4.A7 14.31,16.47 15.22,16.47 15.3,16.55 15.3,17.31 15.15,17.46 14.31,17.46 J4.B7
DP  (via drill 0.35)
  Top 0.152: J4.A6 14.23,16.93 13.39,16.93 13.24,16.78 13.24,16.09 13.39,15.94 14.23,15.94 J4.B6 14.31,15.94 15.99,15.94 18.2,18.15 18.2,20.28 21.4,23.48 22.54,23.48 v25.28,26.22 | v26.96,25.39 27.26,25.69 28.94,25.69 29.93,24.7 31.15,24.7 D1.3
  Bottom 0.152: v26.96,25.39 26.12,25.39 v25.28,26.22
EPD_3V3  (via drill 0.35)
  Top 0.152: J2.16 27.8,10.76 27.42,10.76 J2.15 27.34,10.76 27.34,10.15 v27.64,9.84 27.34,10.07 26.65,9.39 22.16,9.39 19.87,7.1 19.11,7.1 v18.88,7.33 | v7.83,7.33 7.76,7.4 7.3,7.4 6.77,6.87 L5.2 | Q1.3 12.1,27.22 11.64,27.67 v11.49,27.67 | v11.34,22.49 11.34,20.21 10.12,18.99 v10.12,13.58
  Bottom 0.152: EPD_C3.1 35.26,9.08 34.5,9.84 v27.64,9.84 | v7.83,7.33 7.98,7.18 7.98,6.56 C1-EP-DR.1 8.06,6.49 8.06,6.34 8.37,6.03 8.75,6.03 8.94,6.22 | v11.49,27.67 11.49,25.92 13.55,23.86 13.55,23.25 12.79,22.49 v11.34,22.49 | v10.12,13.58 10.12,13.35 10.73,12.74 10.73,11.59 8.98,9.84 8.98,6.26 8.94,6.22 | v18.88,7.33 13.09,7.33 11.57,5.8 9.36,5.8 8.94,6.22
GDR  (via drill 0.35)
  Top 0.152: v20.56,11.67 20.79,11.44 20.79,10.83 J2.2 | v10.88,9.99 10.65,9.77 9.81,9.77 Q3.1
  Bottom 0.152: 17.85,14.45 17.59,14.19 17.59,13.58 19.49,11.67 v20.56,11.67 | 17.85,14.45 17.89,14.49 18.35,14.49 19.03,15.18 19.03,17.31 20.56,18.83 21.17,18.83 22.23,17.77 22.23,14.57 R2_EP_DR.2 | v10.88,9.99 10.88,10.83 11.41,11.37 11.41,14.57 15.45,18.61 15.45,19.9 15.76,20.21 16.37,20.21 17.81,18.76 17.81,14.49 17.85,14.45
GND  (via drill 0.35)  (28 unrouted)
  Top 0.152: U$1.P$87 23.07,16.17 24.14,16.17 U$1.P$88 24.22,16.24 24.22,17.31 U$1.P$74 | 23.34,20.09 23.07,19.82 U$1.P$75 | 23.34,20.09 23.38,20.13 23.38,20.81 23.22,20.97 23.22,21.04 23.15,21.04 23.15,20.97 23.3,20.81 23.3,20.74 U$1.P$B7 | 23.34,20.09 23.61,19.82 24.14,19.82 U$1.P$76 24.14,19.75 24.14,18.68 U$1.P$74 | U$1.P$89 25.43,16.24 25.43,17.31 U$1.P$85 25.43,17.39 U$1.P$74 | U$1.P$83 23.07,17.39 24.14,17.39 U$1.P$84 U$1.P$74 | U$1.P$74 U$1.P$81 | U$1.P$79 23.07,18.61 24.14,18.61 U$1.P$80 24.22,18.53 24.75,18 U$1.P$74 | U$1.P$86 26.58,17.31 25.51,17.31 U$1.P$74 | U$1.P$F23 27.49,19.52 26.88,19.52 26.65,19.75 U$1.P$78 | U$1.P$77 25.43,19.82 26.58,19.82 U$1.P$78 | U$1.P$82 26.65,18.61 26.65,19.37 26.81,19.52 U$1.P$78 | IC9.C2 38.77,21.81 38.39,21.81 IC9.C1 | v9.05,22.11 9.2,22.11 9.36,21.96 10.04,21.96 10.12,21.88 10.04,21.81 10.5,21.35 10.5,21.27 10.58,21.2 10.58,20.81 10.5,20.81 10.5,20.66 10.19,20.36 10.12,20.36 10.12,20.21 10.19,20.21 10.42,20.43 10.42,20.51 10.5,20.59 10.58,20.59 10.65,20.66 10.65,20.74 10.73,20.81 10.65,20.89 10.65,21.12 10.73,21.2 10.65,21.27 10.65,21.35 10.58,21.35 10.5,21.42 10.5,21.5 10.42,21.58 10.35,21.58 10.27,21.65 10.27,21.73 10.19,21.81 10.12,21.81 10.04,21.88 9.2,21.88 9.13,21.96 9.05,21.88 9.13,21.81 9.13,21.73 9.2,21.73 9.2,21.81 9.13,21.88 9.05,21.81 9.05,21.73 8.98,21.65 8.82,21.81 8.9,21.88 8.98,21.88 8.98,21.73 8.75,21.5 8.75,21.42 8.67,21.42 8.67,21.5 8.82,21.65 8.82,21.73 8.75,21.81 8.67,21.73 8.67,21.58 8.59,21.5 8.59,21.42 8.52,21.35 8.52,20.81 8.59,20.81 8.59,20.74 8.52,20.74 8.52,20.66 8.59,20.59 8.67,20.59 8.75,20.51 8.75,20.43 8.82,20.36 8.9,20.36 8.98,20.28 9.66,20.97 9.66,21.04 9.58,21.04 J4.SH1
  Top 0.152: v14.92,21.27 14.92,21.35 15,21.35 15,21.42 14.92,21.5 14.84,21.5 14.77,21.58 14.69,21.58 14.61,21.65 14.61,21.81 14.69,21.81 14.77,21.73 14.77,21.65 14.84,21.58 15,21.58 15.07,21.5 15.07,21.2 15,21.12 15,20.89 15.07,20.81 14.92,20.66 14.92,20.51 15.07,20.51 15.07,20.66 15,20.66 14.92,20.74 14.84,20.74 14.84,20.51 14.92,20.43 15.07,20.43 15.15,20.51 15.15,20.66 15,20.81 15.07,20.89 15.07,21.04 15.15,21.04 15.15,21.12 15.07,21.12 15,21.2 14.92,21.2 14.84,21.27 14.84,21.42 14.77,21.5 14.69,21.5 14.54,21.65 14.54,21.73 14.46,21.81 14.46,21.88 14.54,21.88 14.54,21.81 14.46,21.73 14.46,21.65 14.77,21.35 14.77,21.27 14.92,21.12 14.92,20.81 14.84,20.81 14.77,20.74 14.77,20.59 14.69,20.51 14.69,20.43 15.45,19.67 15.45,19.29 16.37,18.38 16.37,18.07 16.44,18 16.44,17.31 v15.91,16.78 | C3.2 30.08,13.96 30.08,13.65 29.93,13.5 29.17,13.5 28.79,13.88 28.79,13.96 27.49,15.25 27.26,15.25 27.26,15.1 27.19,15.1 27.19,15.33 27.42,15.56 27.72,15.56 27.72,15.63 27.42,15.63 26.88,16.17 26.65,16.17 U$1.P$90 26.58,16.24 26.58,17.23 U$1.P$74 | v17.13,4.51 15.91,4.51 14.69,5.73 14.69,6.03 14.54,6.18 13.17,6.18 13.01,6.03 13.01,5.12 13.09,5.04 13.09,4.97 13.17,4.97 13.17,4.43 13.09,4.43 12.94,4.28 11.11,4.28 11.11,4.58 11.03,4.58 11.03,4.28 11.11,4.2 11.19,4.2 11.19,4.13 10.65,3.59 SW_UP.1 | v39.53,25.01 39,25.54 R2_USB.2 | U$1.P$78 26.58,19.9 26.58,20.51 26.65,20.59 26.65,20.89 27.49,20.89 27.57,20.81 27.64,20.81 27.95,21.12 30.39,21.12 U$2.4 | v37.7,22.26 37.78,22.26 37.93,22.11 38.08,22.11 38.08,22.03 37.93,22.03 37.86,21.96 38.01,21.81 38.08,21.81 38.08,21.88 38.01,21.88 37.93,21.81 38.01,21.73 38.16,21.73 38.16,22.03 38.24,22.03 38.31,22.11 IC9.B1
  Top 0.152: v26.73,30.65 27.34,30.03 28.48,30.03 28.86,30.42 28.86,30.65 C27.2 | v41.97,3.44 41.74,3.44 41.36,3.06 C39.2 | v33.05,4.58 33.05,4.43 32.83,4.2 32.75,4.28 32.75,4.51 32.67,4.51 32.67,4.36 32.29,3.97 SW_DN.1
  Bottom 0.152: C2.2 C42.2 | 28.83,28.4 28.86,28.36 C2.2 | 28.83,28.4 28.63,28.59 28.1,28.59 27.95,28.44 27.95,27.75 26.58,26.38 26.12,26.38 25.82,26.68 25.82,26.84 C23.1 | C2.2 | 31.38,28.13 31.38,28.36 31.15,28.59 29.02,28.59 28.83,28.4 | 35.26,21.27 35.26,19.29 C13.2 35.26,19.22 35.42,19.22 36.48,18.15 36.48,18 C11.2 36.48,17.92 36.48,17.77 34.77,16.05 | 35.26,21.27 35.26,21.73 C22.2 | EPD_C11.2 36.48,14.19 36.48,14.34 35.42,15.41 35.26,15.41 EPD_C12.2 35.19,15.48 35.19,15.63 34.77,16.05 | 34.77,16.05 34.69,16.13 | 34.69,16.13 33.97,16.85 33.97,17.92 C9.2 | 34.69,16.13 33.97,15.41 33.97,14.19 C4.2 33.89,14.11 33.89,13.88 32.9,12.89 EPD_C10.2 32.67,12.51 31.23,11.06 25.66,11.06 25.13,11.59 25.13,12.89 C6.2 25.05,13.12 23.68,14.49 23,14.49 22.96,14.53 | 31.38,28.13 31.38,23.56 33.59,21.35 34.43,21.35 34.5,21.27 35.26,21.27 | 31.38,28.13 C1.2 | 28.94,3.06 29.32,3.06 29.59,2.79 | 28.94,3.06 28.71,3.06 28.41,2.75 27.64,2.75 EPD_C6.2 | 29.59,2.79 29.63,2.75 29.63,1.69 C17.1 | 28.94,3.06 28.94,5.58 28.63,5.88 28.03,5.88 27.64,5.5 27.64,5.27 C16.2 | R_TYPE_SEL.1 41.28,10.07 40.06,10.07 39.07,9.08 EPD_C3.2 39,9.08 39,8.24 39.23,8.01 39.23,6.56 39,6.34 38.77,6.34 C29.2 38.77,5.88 36.71,3.82 33.05,3.82 | 33.05,3.82 31.99,3.82 31,2.83 29.63,2.83 29.59,2.79 | 41.47,27.18 40.52,28.13 EPD_C1.2 40.29,29.88 36.64,33.54 30.62,33.54 28.94,31.86 28.94,31.03 27.95,30.03 27.34,30.03 v26.73,30.65 26.73,32.17 | 41.47,27.18 41.51,27.14 41.51,26.91 C30.2 | 43.23,27.71 43.19,27.67 41.97,27.67 41.47,27.18 | 43.23,27.71 43.42,27.9 43.42,28.13 C37.2 | C7.2 44.79,18 44.79,23.03 C20.2 44.71,23.1 44.71,23.33 43.27,24.78 43.27,27.67 43.23,27.71
  Bottom 0.152: 42.01,3.56 42.05,3.52 43.34,3.52 C19.2 | 42.01,3.56 41.51,4.05 41.51,5.19 C33.2 41.51,5.27 41.51,6.72 43.11,8.32 43.11,9.16 44.1,10.15 44.1,10.3 EPD_C9.2 44.1,10.38 44.1,10.53 43.87,10.76 43.87,15.1 EPD_C7.2 | 26.73,32.17 23.3,32.17 22.77,31.64 21.78,31.64 20.41,33.01 18.58,33.01 18.5,32.93 TP_BAT_GND.TP | 26.73,32.17 27.34,32.17 TP_GND.TP 26.73,32.17 | 22.96,14.53 23,14.57 U$1.P$87 | 22.96,14.53 22.46,14.03 22.31,14.03 R2_EP_DR.1 | C21.2 39.07,15.48 39.3,15.71 39.3,17.31 38.92,17.69 R9.1 38.77,17.77 38.62,17.77 37.55,18.83 37.55,22.26 | 37.55,22.26 37.55,23.33 C38.2 | C31.2 36.48,26.84 36.48,25.62 C8.2 36.56,25.54 36.71,25.39 38.77,25.39 C32.2 38.77,25.31 39.23,25.31 v39.53,25.01 | 17.51,4.51 17.51,4.13 18.65,2.98 18.65,2.75 C10.2 | 17.51,4.51 17.51,5.27 C12.2 | v9.05,22.11 10.19,22.11 11.03,21.27 v14.92,21.27 | v15.91,16.78 15.91,14.34 14.92,13.35 14.92,12.43 15.99,11.37 17.13,11.37 R3.1 17.2,11.29 17.97,11.29 19.26,9.99 19.87,9.99 20.18,10.3 20.18,10.91 19.87,11.21 19.49,11.21 17.81,12.89 EPD_C2.2 | C1-EP-DR.2 8.59,6.56 8.59,11.44 9.51,12.36 J4.SH2 | v17.13,4.51 17.51,4.51 | v37.7,22.26 37.55,22.26 | v41.97,3.44 41.97,3.52 42.01,3.56 | v33.05,4.58 33.05,3.82
  pour Top: -3.07,-6.08 47.58,-6.08 47.58,44.56 -4.33,44.56
HAPTIC_EN/2.6A  (via drill 0.35)
  Top 0.152: 21.78,16.24 21.85,16.24 22.08,16.01 U$1.P$Y2 | 21.78,16.24 21.62,16.24 U$1.P$W1 21.55,16.24 v21.09,15.79 | 21.78,16.24 21.78,16.55 21.62,16.7 U$1.P$U1
  Bottom 0.152: C6.1 24.06,12.89 23.38,13.58 22.01,13.58 21.09,14.49 v21.09,15.79
IMU_INT1  (via drill 0.35)
  Top 0.152: v20.86,17.31 21.32,17.77 21.55,17.77 U$1.P$N1 | v19.95,14.95 19.72,15.18 19.34,15.18 19.26,15.1 19.19,15.18 IC3.5
  Bottom 0.152: v20.86,17.31 20.86,16.47 19.95,15.56 v19.95,14.95
IMU_INT2  (1 unrouted)
LX1
  Top 0.152: IC9.B2 39.15,22.19 IC9.B3 39.23,22.19 39.53,22.19 39.84,22.49 39.91,22.49 41.13,23.71 41.13,25.16 41.51,25.54 L7.1
LX2
  Top 0.152: IC9.D2 38.77,21.42 39.15,21.42 IC9.D3 39.23,21.42 39.53,21.42 39.61,21.35 40.14,21.35 42.05,23.25 42.2,23.25 43.27,24.32 43.27,25.23 43.57,25.54 L7.2
N$1  (via drill 0.35)
  Top 0.152: v19.57,10.6 19.57,10.45 20.02,9.99 21.7,9.99 21.78,10.07 21.78,10.3 21.85,10.38 21.85,10.76 J2.4
  Bottom 0.152: v19.57,10.6 17.89,12.28 16.06,12.28 15.68,12.66 15.68,12.89 EPD_C2.1
N$2  (via drill 0.35)
  Top 0.152: v22.16,22.87 22.54,22.49 22.54,21.2 22.23,20.89 22.23,20.74 U$1.P$B3 | v27.57,29.43 27.95,29.43 28.56,28.82 30.92,28.82 31.68,29.58 32.67,29.58 35.57,26.68 v35.57,23.79 | v41.89,22.19 41.89,20.81 41.59,20.51 L1.1
  Bottom 0.152: v22.16,22.87 22.16,25.62 24.37,27.83 24.37,27.9 25.89,29.43 v27.57,29.43 | v35.57,23.79 36.64,23.79 37.17,24.32 38.85,24.32 39.46,23.71 40.37,23.71 v41.89,22.19
N$3  (via drill 0.35)
  Top 0.152: v38.31,23.33 37.93,23.71 37.93,25.92 38.16,26.15 38.54,26.15 42.27,29.88 42.27,29.96 42.35,30.03 IC1.D1
  Bottom 0.152: v38.31,23.33 38.31,18.76 38.77,18.3 R9.2
N$4  (via drill 0.35)
  Top 0.152: v26.2,23.48 27.26,24.55 27.87,24.55 30.01,22.42 31.99,22.42 32.9,21.5 32.9,19.37 31.84,18.3 29.93,18.3 28.71,19.52 28.48,19.52 28.18,19.82 28.1,19.75 U$1.P$E24 | 23.72,22.07 22.84,21.2 22.84,20.74 U$1.P$B5 | 23.72,22.07 v24.75,23.1 | v9.05,19.67 8.21,20.51 8.21,21.58 8.37,21.73 8.37,24.93 6.84,26.45 5.55,26.45 5.39,26.3 5.39,26.15 5.32,26.07 5.47,25.92 5.47,25.77 C15.1 | 23.72,22.07 v23.91,21.88 | L2.2 43.27,16.7 v43.49,16.47 | v42.88,13.12 42.88,12.74 36.56,6.41 v36.56,6.11 | v10.88,15.41 10.88,14.26 v10.8,14.19 | v12.18,5.5 v11.26,6.41
  Bottom 0.152: v26.2,23.48 25.13,23.48 v24.75,23.1 | v9.05,19.67 11.03,19.67 12.52,18.19 | 12.52,18.19 12.56,18.15 13.85,18.15 14.84,19.14 14.84,20.21 15.45,20.81 16.67,20.81 16.75,20.74 22.77,20.74 v23.91,21.88 | 18.31,2.41 18.5,2.22 18.88,2.22 19.95,3.29 19.95,5.35 20.79,6.18 26.12,6.18 27.03,5.27 C16.1 26.96,5.42 28.63,7.1 34.05,7.1 35.04,6.11 v36.56,6.11 | 18.31,2.41 18.2,2.53 18.2,2.68 C10.1 | v43.49,16.47 43.49,16.01 42.88,15.41 v42.88,13.12 | v10.88,15.41 12.48,17 12.48,18.15 12.52,18.19 | v10.8,14.19 10.8,13.12 11.03,12.89 11.03,11.44 10.27,10.68 10.27,7.4 v11.26,6.41 | v12.18,5.5 12.18,5.27 14.16,3.29 15.22,3.29 16.67,1.84 17.74,1.84 18.31,2.41
N$5
  Top 0.152: IC9.E1 38.31,20.97 38.01,20.66 38.01,19.9 38.08,19.82 38.08,16.47 37.93,16.32 37.78,16.32 37.55,16.55 37.47,16.47 R2.2
N$6  (via drill 0.35)
  Top 0.152: v33.74,32.85 33.05,33.54 13.62,33.54 10.88,30.8 10.88,26.3 11.95,25.23 11.95,20.66 11.64,20.36 11.64,20.05 11.57,19.98 11.57,12.51 12.79,11.29 14.61,11.29 15.3,11.98 15.3,12.13 15.6,12.43 16.82,12.43 19.57,9.69 21.85,9.69 22.31,10.15 J2.5
  Bottom 0.152: v33.74,32.85 36.86,32.85 39.76,29.96 39.76,28.13 EPD_C1.1
N$7  (via drill 0.35)
  Top 0.152: v36.79,22.26 37.7,21.35 37.93,21.35 38.01,21.42 38.31,21.42 IC9.D1 | v36.86,20.13 37.47,19.52 37.47,17.92 36.94,17.39 36.94,12.74 38.39,11.29 38.54,11.29 38.62,11.37 38.77,11.37 R4.2
  Bottom 0.152: v36.79,22.26 36.79,20.21 v36.86,20.13
N$8
  Top 0.152: R1_USB.2 15.68,17.69 15.6,17.61 15.45,17.61 15.07,18 15,18 14.92,17.92 14.31,17.92 J4.A5
N$9  (via drill 0.35)
  Top 0.152: v29.93,3.67 29.93,3.06 R1_EP_DR.1 | v33.74,6.49 36.41,9.16 36.48,9.16 36.71,9.39 36.71,10.07 SJ1.2 37.32,10.68 38.08,10.68 v38.16,10.6
  Bottom 0.152: v29.93,3.67 29.93,4.43 31.99,6.49 v33.74,6.49 | v38.16,10.6 41.28,10.6 R_TYPE_SEL.2
N$10  (via drill 0.35)
  Top 0.152: v28.33,5.27 28.33,9.54 29.02,10.22 28.94,10.3 28.94,10.38 28.86,10.45 28.86,10.76 J2.18
  Bottom 0.152: v28.33,5.27 27.11,4.05 27.11,2.75 EPD_C6.1
N$11  (via drill 0.35)
  Top 0.152: v16.98,14.34 17.28,14.64 17.59,14.64 17.66,14.57 17.74,14.64 IC3.1
  Bottom 0.152: v16.98,14.34 16.37,14.34 15.22,13.2 15.22,12.59 15.91,11.9 17.13,11.9 R3.2
N$12  (1 unrouted)
N$13  (via drill 0.35)
  Top 0.152: v36.64,5.12 36.64,4.97 38.31,3.29 38.39,3.29 38.77,3.67 EPD_C8.1 | v30.69,9.23 29.85,10.07 29.85,10.76 J2.20
  Bottom 0.152: v36.64,5.12 36.64,5.27 37.17,5.8 37.17,6.72 34.65,9.23 v30.69,9.23
N$14  (via drill 0.35)
  Top 0.152: v12.41,28.59 12.41,29.12 12.33,29.2 12.33,29.35 C2-EP-DR.2 | v17.36,21.96 17.36,21.5 16.06,20.21 v16.06,19.6 | v11.79,9.92 11.79,9.16 Q3.3 11.79,9.08 11.57,8.85 11.57,8.24 11.19,7.86 11.11,7.86 7.91,4.66 7.91,3.52 | 7.91,3.52 7.91,3.37 D5.2 7.91,3.52 | 7.91,3.52 5.55,3.52 5.09,3.97 4.94,3.97 4.78,4.13 4.56,4.13 2.27,6.41 2.27,6.79 L5.1
  Bottom 0.152: v12.41,28.59 12.41,25.62 15.53,22.49 16.82,22.49 v17.36,21.96 | v16.06,19.6 16.06,18.76 11.72,14.41 11.72,9.99 v11.79,9.92
N$15  (via drill 0.35)
  Top 0.152: v14.16,22.95 13.85,23.25 13.85,25.23 13.7,25.39 13.7,26.53 12.63,27.6 12.48,27.6 11.79,28.28 11.79,29.12 11.87,29.2 11.87,29.35 C2-EP-DR.1 | v24.9,24.7 27.64,27.44 v31.99,27.44 | v37.93,14.57 38.54,14.57 40.06,13.04 40.67,13.04 D2.1 40.9,12.89 41.06,13.04 41.59,13.04 42.27,13.73 43.19,13.73 43.49,13.42 43.49,12.81 43.34,12.66 43.34,12.36 44.33,11.37 44.33,7.86 D3.2
  Bottom 0.152: v14.16,22.95 14.61,22.95 15.38,22.19 16.21,22.19 17.05,21.35 20.86,21.35 21.47,21.96 22.62,21.96 24.9,24.24 v24.9,24.7 | v31.99,27.44 31.99,23.41 33.05,22.34 33.66,22.34 34.5,23.18 35.11,23.18 36.18,22.11 36.18,18.99 37.93,17.23 v37.93,14.57
N$16  (via drill 0.35)
  Top 0.152: v40.29,18.91 39.61,18.22 39.53,18.22 38.69,17.39 v38.69,17 | v33.74,16.09 v36.86,19.22 | v30.01,11.75 30.31,11.44 30.31,10.83 J2.21
  Bottom 0.152: v40.29,18.91 41.13,18.07 41.13,13.96 43.57,11.52 43.57,10.38 EPD_C9.1 | v38.69,17 36.86,18.83 v36.86,19.22 | v33.74,16.09 33.59,16.09 30.01,12.51 v30.01,11.75
N$17  (via drill 0.35)
  Top 0.152: v30.92,11.67 30.92,11.52 30.84,11.44 30.84,10.83 J2.22
  Bottom 0.152: v30.92,11.67 32.14,12.89 EPD_C10.1
N$18  (via drill 0.35)
  Top 0.152: v33.59,11.37 32.22,9.99 31.45,9.99 31.3,10.15 31.3,10.76 J2.23
  Bottom 0.152: v33.59,11.37 35.95,13.73 35.95,14.11 EPD_C11.1
N$19  (via drill 0.35)
  Top 0.152: v29.78,25.77 29.55,26 26.65,26 25.59,24.93 25.59,22.03 26.04,21.58 26.04,21.27 U$1.P$A18
  Bottom 0.152: v29.78,25.77 29.78,24.7 33.44,21.04 33.82,21.04 34.65,20.21 34.65,19.29 C13.1
N$20  (via drill 0.35)
  Top 0.152: v32.67,11.37 32.14,10.83 31.91,10.83 31.84,10.91 31.76,10.83 J2.24
  Bottom 0.152: v32.67,11.37 34.65,13.35 34.65,15.41 EPD_C12.1
N$21  (1 unrouted)
N$23
  Top 0.152: L2.1 40.29,16.7 41.28,17.69 41.28,18 42.58,19.29 42.58,19.44 42.81,19.67 43.04,19.67 43.57,20.21 43.57,20.51 L1.2
N$25  (1 unrouted)
N$52  (via drill 0.35)
  Top 0.152: v30.24,18.91 29.93,18.91 29.02,19.82 28.63,19.82 28.25,20.21 28.03,20.21 27.87,20.36 27.8,20.28 27.8,20.21 27.57,19.98 U$1.P$D23
  Bottom 0.152: v30.24,18.91 34.35,18.91 35.26,18 35.95,18 C11.1
N$54  (via drill 0.35)
  Top 0.152: v28.71,17.69 28.63,17.77 28.1,17.77 U$1.P$N24
  Bottom 0.152: v28.71,17.69 32.98,17.69 33.21,17.92 33.36,17.92 C9.1
N$55  (via drill 0.35)
  Top 0.152: v25.51,13.58 24.29,12.36 22.77,12.36 21.4,13.73 21.4,14.8 21.78,15.18 21.85,15.1 22.16,15.1 22.23,15.18 22.77,15.18 U$1.P$AC5 | v33.51,20.43 33.51,22.8 v33.36,22.95 | v41.89,23.86 42.12,23.86 42.58,24.32 v42.58,27.06
  Bottom 0.152: v25.51,13.58 25.51,14.19 28.1,16.78 28.1,18 30.54,20.43 v33.51,20.43 | v33.36,22.95 33.82,22.95 35.49,24.62 39,24.62 39.61,24.02 41.74,24.02 v41.89,23.86 | v42.58,27.06 42.58,24.78 44.26,23.1 C20.1
N$69
  Top 0.152: U$1.P$C1 21.55,20.21 21.32,19.98 21.09,19.98 21.01,19.9 20.63,20.28 20.63,20.51 C5.1
N$70  (via drill 0.35)
  Top 0.152: 28.29,22 28.33,22.03 31.3,22.03 31.61,21.73 31.61,21.35 31.84,21.12 U$2.3 | 28.29,22 27.57,21.27 U$1.P$A23 | v27.57,23.94 27.57,22.72 28.29,22
  Bottom 0.152: v27.57,23.94 27.57,25.31 28.33,26.07 28.33,28.13 C2.1
N$71  (via drill 0.35)
  Top 0.152: 29.4,20.13 30.24,20.13 30.39,19.98 U$2.1 | 29.4,20.13 28.79,20.13 28.33,20.59 28.18,20.59 28.1,20.66 U$1.P$B24 | 29.4,20.13 v29.4,20.36
  Bottom 0.152: v29.4,20.36 29.4,24.47 29.17,24.7 29.17,26.07 30.84,27.75 30.84,28.13 C1.1
N$72
  Top 0.152: U$1.P$H23 27.57,18.91 27.64,18.83 28.03,19.22 28.56,19.22 29.78,18 29.78,17 30.08,16.7 L3.1 30.01,16.7 29.78,16.47 29.78,15.41 29.09,14.72 29.09,14.03 29.17,13.96 29.55,13.96 C3.1
N$73  (1 unrouted)
  Top 0.152: U$1.P$D2 22.01,19.9 21.78,19.9 21.62,19.75 21.55,19.75 21.4,19.6 21.32,19.67 21.24,19.67 21.17,19.6 20.02,19.6 19.72,19.29 XTAL1.2
N$74  (via drill 0.35)  (1 unrouted)
  Top 0.152: v33.36,14.95 33.13,15.18 32.75,15.18 32.52,15.41 32.52,16.4 32.22,16.7 L3.2 32.29,16.7 32.52,16.93 32.52,18 34.81,20.28 v34.81,22.57
  Bottom 0.152: v33.36,14.95 33.36,14.19 C4.1 | v34.81,22.57 34.73,22.49 34.73,21.81 C22.1
N$75  (2 unrouted)
OUT+  (via drill 0.35)
  Top 0.152: v10.27,27.6 10.27,28.05 8.06,30.26 7.83,30.26 7.53,29.96 IC2.A3
  Bottom 0.152: v10.27,27.6 9.97,27.6 9.05,26.68 9.05,25.46 9.66,24.85 TP_OP.TP
OUT-  (via drill 0.35)
  Top 0.152: IC2.C3 7.91,28.51 v8.9,28.51
  Bottom 0.152: v8.9,28.51 8.9,28.74 9.58,29.43 9.58,30.49 7.83,32.25 5.93,32.25 TP_ON.TP
P0.13/1.5D  (1 unrouted)
  Top 0.152: R5.1 17.13,1.77 16.98,1.77 16.9,1.84 16.75,1.84 16.67,1.77 16.37,1.77 14.92,3.21 13.85,3.21 13.55,3.52 SW_UP.2
P0.14/1.5D  (via drill 0.35)
  Top 0.152: v17.66,10.68 16.37,11.98 16.21,11.98 16.14,11.9 R8.1 | v23.15,7.4 23.15,5.65 24.9,3.9 | 24.9,3.9 24.9,3.59 SW_ENT.2 24.9,3.9 | v38.92,27.67 v38.01,26.76 | v41.74,15.02 41.59,15.18 37.63,15.18 37.32,14.87 37.32,14.26 39.3,12.28 39.38,12.28 39.68,11.98 39.68,10.15 35.87,6.34 34.5,6.34 34.05,5.88 33.13,5.88 32.67,6.34 30.31,6.34 27.87,3.9 24.9,3.9
  Bottom 0.152: v17.66,10.68 18.12,10.68 21.4,7.4 v23.15,7.4 | v38.01,26.76 37.4,27.37 36.25,27.37 36.03,27.14 36.03,26.91 C31.1 | v38.92,27.67 42.12,24.47 42.2,24.47 42.5,24.17 42.5,21.88 41.97,21.35 39.76,21.35 39.46,21.04 39.46,20.43 40.37,19.52 40.6,19.52 41.74,18.38 v41.74,15.02
P1.01/1.6C
  Top 0.152: R_PWR_EPD.1 9.58,23.33 9.58,23.79 10.12,24.32 10.88,24.32 11.11,24.55 Q1.1
P1.02/1.6C  (via drill 0.35)
  Top 0.152: v38.62,7.56 v39.61,8.55 | v34.43,4.58 35.04,3.97 35.04,3.59 SW_DN.2
  Bottom 0.152: v39.61,8.55 40.45,8.55 41.74,9.84 41.74,10.83 41.36,11.21 37.86,11.21 37.09,10.45 27.34,10.45 27.03,10.15 27.03,9.08 24.44,6.49 22.69,6.49 22.46,6.72 17.66,6.72 16.52,5.58 16.52,4.2 16.06,3.75 15.91,3.75 R7.1 | v38.62,7.56 38.62,7.02 38.66,6.98 | 38.66,6.98 38.77,6.87 C29.1 | v34.43,4.58 34.88,4.13 36.56,4.13 38.31,5.88 38.31,6.64 38.66,6.98
PMIC_INT  (1 unrouted)
RESE  (via drill 0.35)
  Top 0.152: v29.02,2.45 29.4,2.45 29.47,2.37 29.55,2.37 29.63,2.45 29.85,2.45 R1_EP_DR.2 | v24.14,7.1 v24.14,5.58 | v21.47,11.67 21.47,11.52 21.32,11.37 21.32,10.83 J2.3 | v10.88,8.47 9.81,8.47 Q3.2
  Bottom 0.152: v29.02,2.45 28.03,2.45 27.8,2.22 26.65,2.22 24.14,4.74 v24.14,5.58 | v21.47,11.67 24.14,9 v24.14,7.1 23.83,6.79 22.84,6.79 22.62,7.02 21.32,7.02 19.87,8.47 v10.88,8.47
RESET  (2 unrouted)
SCL/1.4C  (1 unrouted)
SCL/2.4C  (via drill 0.35)  (1 unrouted)
  Top 0.152: 39,29.96 38.77,29.96 38.54,29.73 38.46,29.81 37.93,29.81 37.55,29.43 TP_SCL.TP | 39,29.96 39.68,29.96 40.6,30.87 42.35,30.87 IC1.B1 | v18.42,15.48 18.2,15.25 18.12,15.33 18.04,15.33 17.97,15.25 17.74,15.25 IC3.12 | v35.8,7.18 39.38,10.76 39.38,11.82 39.23,11.98 39.07,11.98 39,11.9 R4.1 | v25.66,6.79 24.44,8.01 22.69,8.01 20.56,5.88 v20.56,5.04 | v39,29.81 39,29.96 | v30.01,30.11 29.32,29.43 v28.86,29.43
  Bottom 0.152: v18.42,15.48 18.42,17.16 19.15,17.88 | 19.15,17.88 21.7,20.43 26.96,20.43 29.02,22.49 29.02,23.03 28.79,23.25 28.63,23.25 R17.2 28.56,23.33 27.26,23.33 24.67,25.92 24.67,27.75 24.98,28.05 27.11,28.05 28.48,29.43 v28.86,29.43 | v35.8,7.18 34.43,7.18 34.2,7.4 26.27,7.4 v25.66,6.79 | v20.56,5.04 20.56,3.44 18.65,1.54 16.37,1.54 14.92,2.98 10.8,2.98 7.22,6.56 7.22,9.16 8.29,10.22 8.29,12.66 10.42,14.8 11.19,14.8 15.15,18.76 15.15,20.05 15.6,20.51 16.52,20.51 19.15,17.88 | v39,29.81 36.33,29.81 35.04,31.1 31.68,31.1 30.69,30.11 v30.01,30.11
SDA/1.4C  (1 unrouted)
SDA/2.4C  (via drill 0.35)
  Top 0.152: v20.86,18.22 20.94,18.3 21.09,18.3 21.17,18.22 U$1.P$L1 | IC3.2 v18.2,13.88 18.58,13.88 20.18,12.28 21.93,12.28 22.46,11.75 25.59,11.75 v25.74,11.9 | 36.9,28.02 32.9,32.02 32.44,32.02 TP_SDA.TP | 36.9,28.02 36.94,27.98 38.16,27.98 40.67,30.49 42.35,30.49 IC1.C1 | 36.98,21.16 36.18,21.96 36.18,27.29 36.9,28.02 | 36.98,21.16 37.47,20.66 37.47,19.98 37.78,19.67 37.78,17.77 37.47,17.46 37.47,17.39 37.55,17.31 37.55,17 R2.1 | v33.36,17.16 33.36,17.54 36.98,21.16
  Bottom 0.152: v20.86,18.22 19.34,16.7 19.34,13.96 19.38,13.92 | 19.38,13.92 20.1,13.2 20.94,13.2 R18.2 | v18.2,13.88 19.34,13.88 19.38,13.92 | v25.74,11.9 28.1,11.9 v33.36,17.16
SWDCLK  (2 unrouted)
SWDIO  (1 unrouted)
SWO  (1 unrouted)
VBAT/1.2A  (via drill 0.35)  (1 unrouted)
  Top 0.152: U3.3 15,7.63 15,8.01 U3.2 | v27.64,30.65 28.33,30.65 C27.1
  Bottom 0.152: v27.64,30.65 27.64,30.8 28.63,31.79 28.63,32.7 27.8,33.54 22.92,33.54 22.31,32.93 TP_VBAT.TP
VBAT/2.5C  (1 unrouted)
VBUS/1.5D  (via drill 0.35)  (2 unrouted)
  Top 0.152: 32.1,23.6 32.67,24.17 32.67,25.31 32.9,25.54 33.66,25.54 D1.5 | 32.1,23.6 32.06,23.56 32.06,23.33 32.14,23.25 32.14,23.1 C43.1 | v28.25,25.08 29.09,25.08 30.46,23.71 31.99,23.71 32.1,23.6
  Bottom 0.152: v28.25,25.08 28.33,25.01 28.33,24.32 C42.1
VBUS/2.6D  (via drill 0.35)
  Top 0.152: v23.07,12.97 21.7,14.34 21.7,14.41 22.01,14.72 U$1.P$AD2 | v40.22,14.41 42.35,14.41 44.64,16.7 44.64,26.84 43.8,27.67 43.8,30.95 43.19,31.56 43.04,31.41 42.88,31.41 42.81,31.33 IC1.A2
  Bottom 0.152: v23.07,12.97 23.3,12.97 25.51,10.76 35.04,10.76 38.54,14.26 38.54,14.41 | 38.54,14.41 38.54,15.41 C21.1 | 38.54,14.41 39.61,14.41 | 39.61,14.41 v40.22,14.41 | 39.61,14.41 39.61,18.07 38.85,18.83 38.85,22.8 38.92,22.87 38.92,23.63 38.62,23.94 37.55,23.94 C38.1
VREG  (via drill 0.35)
  Top 0.152: v24.06,26.22 v25.28,27.44 27.19,27.44 27.95,28.21 v32.52,28.21 | 41.02,1.8 41.28,2.07 41.28,2.37 41.21,2.45 41.28,2.53 C39.1 | 41.02,1.8 40.9,1.69 40.45,1.69 40.29,1.54 C24.2 | 38.77,22.57 38.62,22.57 38.54,22.49 38.46,22.57 38.39,22.57 IC9.A1 | 40.14,25.92 40.14,23.56 39.65,23.06 | 40.14,25.92 40.14,26.45 43.42,29.73 43.42,30.65 43.19,30.87 42.81,30.87 IC1.B2 | 39.65,23.06 39.23,22.64 IC9.A3 39.15,22.64 39,22.49 38.92,22.57 38.77,22.57 | 38.77,22.57 IC9.A2 | 41.02,1.8 40.52,2.3 v40.45,2.3 | v39.61,23.1 39.65,23.06 | 40.14,25.92 v39.76,25.92
  Bottom 0.152: v25.28,27.44 25.97,27.44 26.27,27.14 26.27,26.91 C23.2 | v24.06,26.22 24.06,23.86 22.46,22.26 17.97,22.26 16.98,23.25 15.22,23.25 13.01,25.46 13.01,28.89 12.71,29.2 10.96,29.2 8.37,26.61 6,26.61 TP_VREG.TP | v40.45,2.3 38.85,2.3 38.62,2.07 38.01,2.07 37.7,2.37 37.7,3.37 42.35,8.01 42.35,12.28 40.83,13.8 40.83,17.46 39.15,19.14 39.15,22.64 v39.61,23.1 | v32.52,28.21 32.52,28.59 32.6,28.66 32.6,30.03 33.36,30.8 34.88,30.8 v39.76,25.92